# Altium PCB GPS-Module.PcbDoc (part 2 of 2)
Units mil, origin at the board's own origin, x right, y up, seen from the top; angles counter-clockwise.
Board outline 1574.8 x 1665 mil, 4 copper layers (Top Layer, Int1 (GND), Int2 (PWR), Bottom Layer), stack 60.119 mil thick; 48 components, 36 nets, 261 pads, 21 vias.
Unrouted connection lines stored in the file: 132.
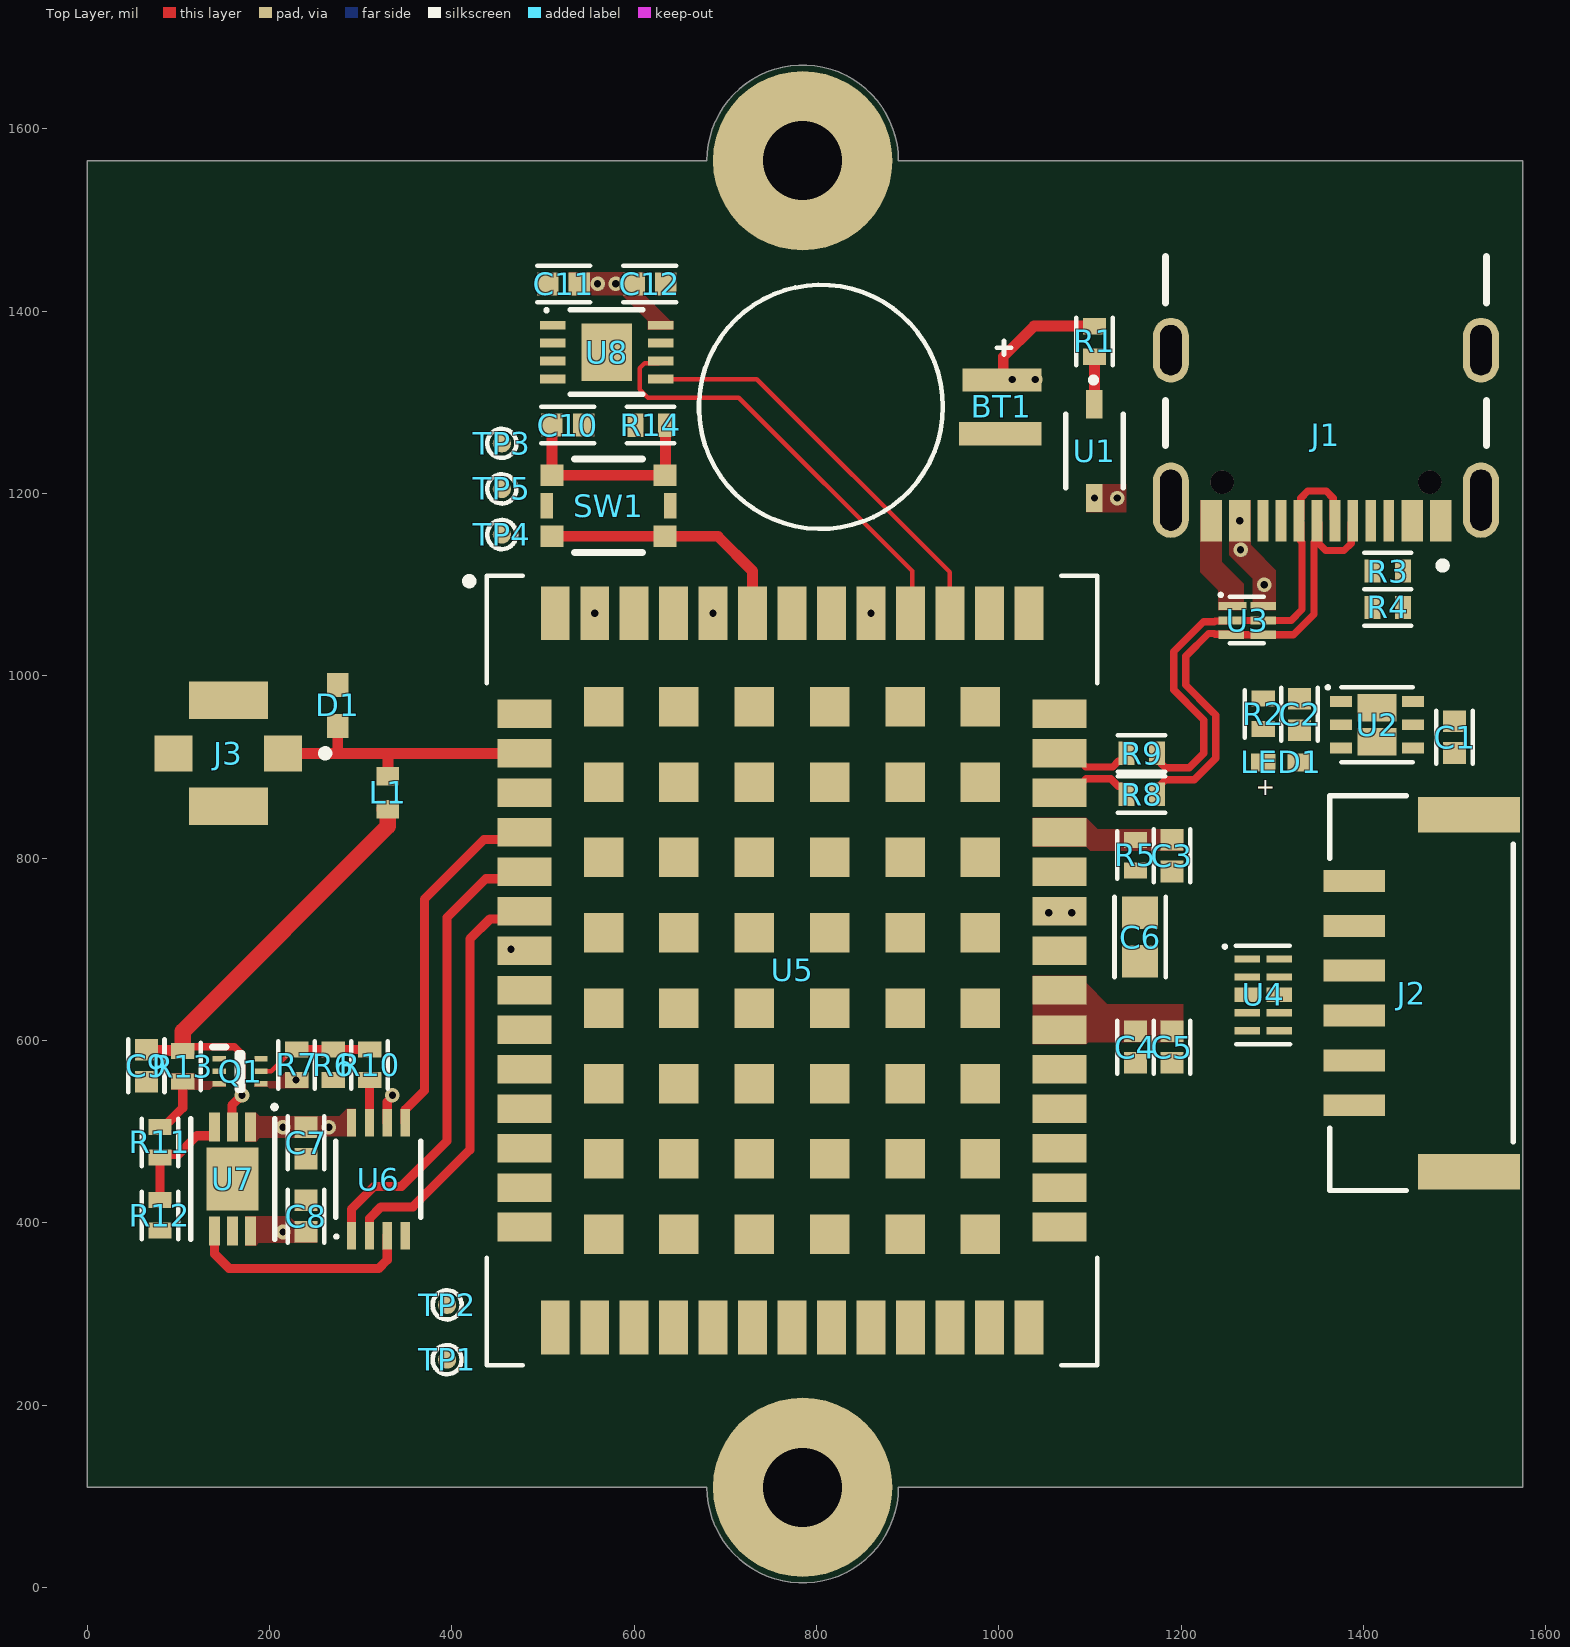
[diagram p0: Top Layer view]

## Part data (continued)
R1: library part ERJ-2RKF3001X, "Res Thick Film 0402 3K Ohm 1% 0.1W ±100ppm/°C Molded SMD Punched Carrier T/R", Case Code (Imperial)=0402, Case Code (Metric)=1005, Manufacturer=Panasonic, Max Operating Temperature=155°C, Max Power Dissipation=100mW, Min Operating Temperature=-55°C, Supplier Part Number=P3.00KLCT-ND, Temperature Coefficient=100ppm/°C, Tolerance=1%, Voltage Rating=50V, Case/Package=0402, Category="Chip SMD Resistors", China RoHS=Non-Compliant, ComponentLink1Description=https://sigma.octopart.com:443/138766958/technical_drawing/Panasonic-ERJ-2RKF3001X.pdf?src-supplier=Upverter, ComponentLink1URL=https://sigma.octopart.com:443/138766958/technical_drawing/Panasonic-ERJ-2RKF3001X.pdf?src-supplier=Upverter, ComponentLink2Description=https://datasheet.octopart.com:443/ERJ-2RKF3001X-Panasonic-datasheet-82288794.pdf?src-supplier=Panasonic+SCT, ComponentLink2URL=https://datasheet.octopart.com:443/ERJ-2RKF3001X-Panasonic-datasheet-82288794.pdf?src-supplier=Panasonic+SCT, ComponentLink3Description=https://datasheet.octopart.com:443/ERJ-2RKF3001X-Panasonic-datasheet-13266541.pdf?src-supplier=Future+Electronics, ComponentLink3URL=https://datasheet.octopart.com:443/ERJ-2RKF3001X-Panasonic-datasheet-13266541.pdf?src-supplier=Future+Electronics, ComponentLink4Description=https://datasheet.octopart.com:443/ERJ-2RKF3001X-Panasonic-datasheet-10025800.pdf?src-supplier=Future+Electronics, ComponentLink4URL=https://datasheet.octopart.com:443/ERJ-2RKF3001X-Panasonic-datasheet-10025800.pdf?src-supplier=Future+Electronics, ComponentLink5Description=https://datasheet.octopart.com:443/ERJ-2RKF3001X-Panasonic-datasheet-8853621.pdf?src-supplier=Future+Electronics, ComponentLink5URL=https://datasheet.octopart.com:443/ERJ-2RKF3001X-Panasonic-datasheet-8853621.pdf?src-supplier=Future+Electronics, ComponentLink6Description=https://datasheet.octopart.com:443/ERJ-2RKF3001X-Panasonic-datasheet-5313456.pdf?src-supplier=Future+Electronics, ComponentLink6URL=https://datasheet.octopart.com:443/ERJ-2RKF3001X-Panasonic-datasheet-5313456.pdf?src-supplier=Future+Electronics, ComponentLink7Description=https://datasheet.octopart.com:443/ERJ-2RKF3001X-Panasonic-datasheet-48891056.pdf?src-supplier=Newark, ComponentLink7URL=https://datasheet.octopart.com:443/ERJ-2RKF3001X-Panasonic-datasheet-48891056.pdf?src-supplier=Newark, ComponentLink8Description=https://datasheet.octopart.com:443/ERJ-2RKF3001X-Panasonic-datasheet-136608610.pdf?src-supplier=Newark, ComponentLink8URL=https://datasheet.octopart.com:443/ERJ-2RKF3001X-Panasonic-datasheet-136608610.pdf?src-supplier=Newark, ComponentLink9Description=https://datasheet.octopart.com:443/ERJ-2RKF3001X-Panasonic-datasheet-33006990.pdf?src-supplier=Newark, ComponentLink9URL=https://datasheet.octopart.com:443/ERJ-2RKF3001X-Panasonic-datasheet-33006990.pdf?src-supplier=Newark, ComponentLink10Description=https://datasheet.octopart.com:443/ERJ2RKF3001X-Panasonic-datasheet-21211697.pdf?src-supplier=element14+APAC, ComponentLink10URL=https://datasheet.octopart.com:443/ERJ2RKF3001X-Panasonic-datasheet-21211697.pdf?src-supplier=element14+APAC, ComponentLink11Description=https://datasheet.octopart.com:443/ERJ-2RKF3001X-Panasonic-datasheet-154766169.pdf?src-supplier=Master+Electronics, ComponentLink11URL=https://datasheet.octopart.com:443/ERJ-2RKF3001X-Panasonic-datasheet-154766169.pdf?src-supplier=Master+Electronics, ComponentLink12Description=https://datasheet.octopart.com:443/ERJ2RKF3001X-Panasonic-datasheet-188592431.pdf?src-supplier=TME, ComponentLink12URL=https://datasheet.octopart.com:443/ERJ2RKF3001X-Panasonic-datasheet-188592431.pdf?src-supplier=TME, ComponentLink13Description=https://datasheet.octopart.com:443/ERJ2RKF3001X-Panasonic-datasheet-164353789.pdf?src-supplier=TME, ComponentLink13URL=https://datasheet.octopart.com:443/ERJ2RKF3001X-Panasonic-datasheet-164353789.pdf?src-supplier=TME, ComponentLink14Description=https://datasheet.octopart.com/ERJ-2RKF3001X-Panasonic-datasheet-78375410.pdf, ComponentLink14URL=https://datasheet.octopart.com/ERJ-2RKF3001X-Panasonic-datasheet-78375410.pdf, ComponentLink15Description=https://datasheet.octopart.com:443/ERJ-2RKF3001X-Panasonic---ECG-datasheet-15994758.pdf?src-supplier=Farnell, ComponentLink15URL=https://datasheet.octopart.com:443/ERJ-2RKF3001X-Panasonic---ECG-datasheet-15994758.pdf?src-supplier=Farnell, ComponentLink16Description=https://datasheet.octopart.com:443/ERJ-2RKF3001X-Panasonic-datasheet-11542829.pdf?src-supplier=Arrow+Electronics, ComponentLink16URL=https://datasheet.octopart.com:443/ERJ-2RKF3001X-Panasonic-datasheet-11542829.pdf?src-supplier=Arrow+Electronics, ComponentLink17Description=https://datasheet.octopart.com:443/ERJ-2RKF3001X-Panasonic-datasheet-41391857.pdf?src-supplier=Electro+Sonic, ComponentLink17URL=https://datasheet.octopart.com:443/ERJ-2RKF3001X-Panasonic-datasheet-41391857.pdf?src-supplier=Electro+Sonic, Composition="Thick Film", Contact Plating=Tin, Depth=500µm, Features="Automotive AEC-Q200", Height=350µm, Lead Free="Lead Free", Length=1mm, Lifecycle Status=Production, Military Standard=Not, Mounting Technology="Surface Mount", MPN=ERJ-2RKF3001X, Number of Terminals=2, Number of Terminations=2, Packaging="Cut Tape", Power Dissipation=100mW, Power Rating=100mW, Pricing="1=0.1, 10=0.028, 25=0.0208, 50=0.0168, 100=0.0138, 250=0.01072, 500=0.009, 1000=0.00766, 5000=0.00554 (USD)", Radiation Hardening=No, REACH SVHC=Yes, RoHS=Compliant, Schedule B="8533210045, 8533210045|8533210045, 8533210045|8533210045|8533210045, 8533210045|8533210045|8533210045|8533210045", Stock=193068, Supplier=DigiKey, Termination=SMD/SMT, Voltage Rating (DC)=50V, Width=500µm, Working Voltage=50V
R2 R14: library part CRCW0402100RFKEDHP, "Res Thick Film 0402 100 Ohm 1% 0.2W ±100ppm/°C Molded SMD SMD Paper T/R", Case Code (Imperial)=0402, Case Code (Metric)=1005, Manufacturer=Vishay, Manufacturer Package Identifier=CRCW0402-HPe3, Max Operating Temperature=155°C, Min Operating Temperature=-55°C, Power Dissipation=200mW, Supplier Part Number=541-100YCT-ND, Temperature Coefficient=100ppm/°C, Tolerance=1%, Voltage Rating=50V, Case/Package=0402, Category="Chip SMD Resistors", China RoHS=Non-Compliant, ComponentLink1Description=https://datasheet.octopart.com/CRCW0402100RFKEDHP-Vishay-datasheet-83567917.pdf, ComponentLink1URL=https://datasheet.octopart.com/CRCW0402100RFKEDHP-Vishay-datasheet-83567917.pdf, ComponentLink2Description=https://datasheet.octopart.com/D-CRCW-e3-Standard-Thick-Film-Chip-Resistors-Vishay-datasheet-family-64.pdf, ComponentLink2URL=https://datasheet.octopart.com/D-CRCW-e3-Standard-Thick-Film-Chip-Resistors-Vishay-datasheet-family-64.pdf, ComponentLink3Description=https://datasheet.octopart.com:443/CRCW0402100RFKEDHP-Vishay-datasheet-87136057.pdf?src-supplier=element14+APAC, ComponentLink3URL=https://datasheet.octopart.com:443/CRCW0402100RFKEDHP-Vishay-datasheet-87136057.pdf?src-supplier=element14+APAC, ComponentLink4Description=https://datasheet.octopart.com:443/CRCW0402100RFKEDHP-Vishay-datasheet-78776210.pdf?src-supplier=element14+APAC, ComponentLink4URL=https://datasheet.octopart.com:443/CRCW0402100RFKEDHP-Vishay-datasheet-78776210.pdf?src-supplier=element14+APAC, ComponentLink5Description=https://datasheet.octopart.com:443/CRCW0402100RFKEDHP-Vishay-datasheet-62317933.pdf?src-supplier=element14+APAC, ComponentLink5URL=https://datasheet.octopart.com:443/CRCW0402100RFKEDHP-Vishay-datasheet-62317933.pdf?src-supplier=element14+APAC, ComponentLink6Description=https://datasheet.octopart.com:443/CRCW0402100RFKEDHP-Vishay-datasheet-37143532.pdf?src-supplier=element14+APAC, ComponentLink6URL=https://datasheet.octopart.com:443/CRCW0402100RFKEDHP-Vishay-datasheet-37143532.pdf?src-supplier=element14+APAC, ComponentLink7Description=https://datasheet.octopart.com:443/CRCW0402100RFKEDHP-Vishay-datasheet-66581887.pdf?src-supplier=element14+APAC, ComponentLink7URL=https://datasheet.octopart.com:443/CRCW0402100RFKEDHP-Vishay-datasheet-66581887.pdf?src-supplier=element14+APAC, ComponentLink8Description=https://datasheet.octopart.com:443/CRCW0402100RFKEDHP-Vishay-datasheet-13148866.pdf?src-supplier=_legacy+Avnet, ComponentLink8URL=https://datasheet.octopart.com:443/CRCW0402100RFKEDHP-Vishay-datasheet-13148866.pdf?src-supplier=_legacy+Avnet, ComponentLink9Description=https://datasheet.octopart.com:443/CRCW0402100RFKEDHP-Vishay-datasheet-13131392.pdf?src-supplier=_legacy+Avnet, ComponentLink9URL=https://datasheet.octopart.com:443/CRCW0402100RFKEDHP-Vishay-datasheet-13131392.pdf?src-supplier=_legacy+Avnet, ComponentLink10Description=https://datasheet.octopart.com:443/CRCW0402100RFKEDHP-Vishay-datasheet-12593106.pdf?src-supplier=_legacy+Avnet, ComponentLink10URL=https://datasheet.octopart.com:443/CRCW0402100RFKEDHP-Vishay-datasheet-12593106.pdf?src-supplier=_legacy+Avnet, ComponentLink11Description=https://datasheet.octopart.com:443/CRCW0402100RFKEDHP-Vishay-datasheet-12544674.pdf?src-supplier=_legacy+Avnet, ComponentLink11URL=https://datasheet.octopart.com:443/CRCW0402100RFKEDHP-Vishay-datasheet-12544674.pdf?src-supplier=_legacy+Avnet, ComponentLink12Description=https://datasheet.octopart.com:443/CRCW0402100RFKEDHP-Vishay-datasheet-12531795.pdf?src-supplier=_legacy+Avnet, ComponentLink12URL=https://datasheet.octopart.com:443/CRCW0402100RFKEDHP-Vishay-datasheet-12531795.pdf?src-supplier=_legacy+Avnet, ComponentLink13Description=https://datasheet.octopart.com:443/CRCW0402100RFKEDHP-Vishay-datasheet-12518686.pdf?src-supplier=_legacy+Avnet, ComponentLink13URL=https://datasheet.octopart.com:443/CRCW0402100RFKEDHP-Vishay-datasheet-12518686.pdf?src-supplier=_legacy+Avnet, ComponentLink14Description=https://datasheet.octopart.com:443/CRCW0402100RFKEDHP-Vishay-datasheet-12509906.pdf?src-supplier=_legacy+Avnet, ComponentLink14URL=https://datasheet.octopart.com:443/CRCW0402100RFKEDHP-Vishay-datasheet-12509906.pdf?src-supplier=_legacy+Avnet, ComponentLink15Description=https://datasheet.octopart.com:443/CRCW0402100RFKEDHP-Vishay-datasheet-10669844.pdf?src-supplier=_legacy+Avnet, ComponentLink15URL=https://datasheet.octopart.com:443/CRCW0402100RFKEDHP-Vishay-datasheet-10669844.pdf?src-supplier=_legacy+Avnet, ComponentLink16Description=https://datasheet.octopart.com:443/CRCW0402100RFKEDHP-Vishay-datasheet-8703221.pdf?src-supplier=_legacy+Avnet, ComponentLink16URL=https://datasheet.octopart.com:443/CRCW0402100RFKEDHP-Vishay-datasheet-8703221.pdf?src-supplier=_legacy+Avnet, ComponentLink17Description=https://datasheet.octopart.com:443/CRCW0402100RFKEDHP-Vishay-datasheet-62316122.pdf?src-supplier=Future+Electronics, ComponentLink17URL=https://datasheet.octopart.com:443/CRCW0402100RFKEDHP-Vishay-datasheet-62316122.pdf?src-supplier=Future+Electronics, ComponentLink18Description=https://datasheet.octopart.com:443/CRCW0402100RFKEDHP-Vishay-Dale-datasheet-47688881.pdf?src-supplier=RS+(Formerly+Allied+Electronics), ComponentLink18URL=https://datasheet.octopart.com:443/CRCW0402100RFKEDHP-Vishay-Dale-datasheet-47688881.pdf?src-supplier=RS+(Formerly+Allied+Electronics), ComponentLink19Description=https://datasheet.octopart.com:443/CRCW0402100RFKEDHP-Vishay-datasheet-8359436.pdf?src-supplier=Newark, ComponentLink19URL=https://datasheet.octopart.com:443/CRCW0402100RFKEDHP-Vishay-datasheet-8359436.pdf?src-supplier=Newark, ComponentLink20Description=http://sigma.octopart.com:80/rohs_certificate/D-CRCW-e3-Standard-Thick-Film-Chip-Resistors-Vishay-family-102.pdf?src-supplier=Compliance+Statements, ComponentLink20URL=http://sigma.octopart.com:80/rohs_certificate/D-CRCW-e3-Standard-Thick-Film-Chip-Resistors-Vishay-family-102.pdf?src-supplier=Compliance+Statements, Composition="Thick Film", Contact Plating=Tin, Depth=500µm, Height=300µm, Lead Free="Lead Free", Length=1mm, Lifecycle Status=Production, Mounting Technology="Surface Mount", MPN=CRCW0402100RFKEDHP, Number of Terminals=2, Packaging="Cut Tape", Power Rating=200mW, Pricing="1=0.11, 10=0.054, 25=0.0412, 50=0.034, 100=0.0286, 250=0.02312, 500=0.02002, 1000=0.01755, 5000=0.01363 (USD)", Radiation Hardening=No, REACH SVHC=Yes, RoHS=Compliant, Schedule B="8533210045, 8533210045|8533210045|8533210045|8533210045|8533210045|8533210045|8533210045, 8533210045|8533210045|8533210045|8533210045|8533210045|8533210045|8533210045|8533210045, 8533210045|8533210045|8533210045|8533210045|8533210045|8533210045|8533210045|8533210045|8533210045", Stock=523985, Supplier=DigiKey, Termination=SMD/SMT, Voltage Rating (DC)=50V, Weight=652.039032µg, Width=500µm, Working Voltage=50V
R3 R4: library part RC0402FR-135K1L, "Res Thick Film 0402 5.1K Ohm 1% 0.063W(1/16W) ±100ppm/C Pad SMD T/R", Case Code (Imperial)=0402, Case Code (Metric)=1005, Manufacturer="Yageo Group", Max Operating Temperature=155°C, Min Operating Temperature=-55°C, Power Dissipation=62.5mW, Supplier Part Number=13-RC0402FR-135K1LCT-ND, Temperature Coefficient=100ppm/°C, Tolerance=1%, Voltage Rating=50V, Case/Package=0402, Category="Chip SMD Resistors", China RoHS=Non-Compliant, ComponentLink1Description=https://datasheet.octopart.com:443/RC0402FR-135K1L-Yageo-datasheet-175887523.pdf?src-supplier=IHS, ComponentLink1URL=https://datasheet.octopart.com:443/RC0402FR-135K1L-Yageo-datasheet-175887523.pdf?src-supplier=IHS, ComponentLink2Description=https://datasheet.octopart.com:443/RC0402FR-135K1L-Yageo-datasheet-164759695.pdf?src-supplier=Future+Electronics, ComponentLink2URL=https://datasheet.octopart.com:443/RC0402FR-135K1L-Yageo-datasheet-164759695.pdf?src-supplier=Future+Electronics, ComponentLink3Description=https://datasheet.octopart.com/RC0402FR-135K1L-Yageo-datasheet-73766026.pdf, ComponentLink3URL=https://datasheet.octopart.com/RC0402FR-135K1L-Yageo-datasheet-73766026.pdf, ComponentLink4Description=https://datasheet.octopart.com:443/RC0402FR-135K1L-Yageo-datasheet-10408619.pdf?src-supplier=_legacy+Avnet, ComponentLink4URL=https://datasheet.octopart.com:443/RC0402FR-135K1L-Yageo-datasheet-10408619.pdf?src-supplier=_legacy+Avnet, ComponentLink5Description=http://sigma.octopart.com:80/conflict_mineral_statement/Yageo-company-3.pdf?src-supplier=Compliance+Statements, ComponentLink5URL=http://sigma.octopart.com:80/conflict_mineral_statement/Yageo-company-3.pdf?src-supplier=Compliance+Statements, ComponentLink6Description=http://sigma.octopart.com:80/rohs_statement/Yageo-company-2.pdf?src-supplier=Compliance+Statements, ComponentLink6URL=http://sigma.octopart.com:80/rohs_statement/Yageo-company-2.pdf?src-supplier=Compliance+Statements, Composition="Thick Film", Contact Plating=Tin, Height=350µm, Length=1mm, Lifecycle Status=Production, Mounting Technology="Surface Mount", MPN=RC0402FR-135K1L, Number of Terminals=2, Packaging="Tape & Reel", Power Rating=62.5mW, Pricing="1=0.1, 10=0.005, 25=0.0044, 50=0.004, 100=0.0036, 250=0.00328 (USD)", Radiation Hardening=No, REACH SVHC=Yes, RoHS=Compliant, Stock=214134, Supplier=DigiKey, Termination=SMD/SMT, Width=500µm, Working Voltage=50V
R5 R7 R12: library part CRCW0402100KFKEDC, "Res Thick Film 0402 100K Ohm 1% 0.063W(1/16W) ±100ppm/C Pad SMD T/R", Case/Package=0402, Manufacturer=Vishay, Max Operating Temperature=155°C, Min Operating Temperature=-55°C, Power Dissipation=63mW, Supplier Part Number=541-3960-1-ND, Temperature Coefficient=100ppm/°C, Tolerance=1%, Voltage Rating=50V, Category="Chip SMD Resistors", China RoHS=Non-Compliant, ComponentLink1Description=https://datasheet.octopart.com:443/CRCW0402100KFKEDC-Vishay-datasheet-102570912.pdf?src-supplier=Upverter, ComponentLink1URL=https://datasheet.octopart.com:443/CRCW0402100KFKEDC-Vishay-datasheet-102570912.pdf?src-supplier=Upverter, ComponentLink2Description=https://datasheet.octopart.com:443/CRCW0402100KFKEDC-Vishay-datasheet-175423585.pdf?src-supplier=IHS, ComponentLink2URL=https://datasheet.octopart.com:443/CRCW0402100KFKEDC-Vishay-datasheet-175423585.pdf?src-supplier=IHS, ComponentLink3Description=https://datasheet.octopart.com:443/CRCW0402100KFKEDC-Vishay-datasheet-100063072.pdf?src-supplier=Future+Electronics, ComponentLink3URL=https://datasheet.octopart.com:443/CRCW0402100KFKEDC-Vishay-datasheet-100063072.pdf?src-supplier=Future+Electronics, ComponentLink4Description=https://datasheet.octopart.com:443/CRCW0402100KFKEDC-Vishay-datasheet-62316122.pdf?src-supplier=Future+Electronics, ComponentLink4URL=https://datasheet.octopart.com:443/CRCW0402100KFKEDC-Vishay-datasheet-62316122.pdf?src-supplier=Future+Electronics, ComponentLink5Description=http://sigma.octopart.com:80/rohs_statement/Vishay-company-15.pdf?src-supplier=Compliance+Statements, ComponentLink5URL=http://sigma.octopart.com:80/rohs_statement/Vishay-company-15.pdf?src-supplier=Compliance+Statements, Composition="Thick Film", Contact Plating=Tin, Height=300µm, Lead Free="Lead Free", Length=1mm, Lifecycle Status=Production, Mounting Technology="Surface Mount", MPN=CRCW0402100KFKEDC, Number of Terminals=2, Power Rating=63mW, Pricing="1=0.1, 10=0.028, 25=0.0208, 50=0.0168, 100=0.0138, 250=0.01072, 500=0.009, 1000=0.00766, 5000=0.00554 (USD)", REACH SVHC=Yes, RoHS=Compliant, Schedule B="8533210045, 8533210045|8533210045, 8533210045|8533210045|8533210045, 8533210045|8533210045|8533210045|8533210045", Stock=265190, Supplier=DigiKey, Termination=Wraparound, Width=500µm, Working Voltage=50V
R6 R10: library part RC0402JR-070RL, "GENERAL PURPOSE CHIP RESISTOR Metal Glaze/thick Film, 0.0625W, 0ohm, Surface Mount, 0402", Case Code (Imperial)=0402, Manufacturer="Yageo Group", Max Operating Temperature=155°C, Max Power Dissipation=63mW, Min Operating Temperature=-55°C, Power Dissipation=62.5mW, Supplier Part Number=311-0.0JRCT-ND, Temperature Coefficient=200ppm/°C, Tolerance=5%, Voltage Rating=50V, Case/Package=0402, Category="Chip SMD Resistors", China RoHS=Non-Compliant, ComponentLink1Description=https://datasheet.octopart.com:443/RC0402JR-070RL-Yageo-datasheet-182189538.pdf?src-supplier=IHS, ComponentLink1URL=https://datasheet.octopart.com:443/RC0402JR-070RL-Yageo-datasheet-182189538.pdf?src-supplier=IHS, ComponentLink2Description=https://datasheet.octopart.com:443/RC0402JR-070RL-Yageo-datasheet-10408619.pdf?src-supplier=Newark, ComponentLink2URL=https://datasheet.octopart.com:443/RC0402JR-070RL-Yageo-datasheet-10408619.pdf?src-supplier=Newark, ComponentLink3Description=https://datasheet.octopart.com:443/RC0402JR-070RL-Yageo-datasheet-12531192.pdf?src-supplier=Seeed+Studio, ComponentLink3URL=https://datasheet.octopart.com:443/RC0402JR-070RL-Yageo-datasheet-12531192.pdf?src-supplier=Seeed+Studio, ComponentLink4Description=https://datasheet.octopart.com:443/RC0402JR-070RL-Yageo-datasheet-8324527.pdf?src-supplier=TME, ComponentLink4URL=https://datasheet.octopart.com:443/RC0402JR-070RL-Yageo-datasheet-8324527.pdf?src-supplier=TME, ComponentLink5Description=https://datasheet.octopart.com:443/RC0402JR-070RL-Yageo-datasheet-62067350.pdf?src-supplier=Farnell, ComponentLink5URL=https://datasheet.octopart.com:443/RC0402JR-070RL-Yageo-datasheet-62067350.pdf?src-supplier=Farnell, ComponentLink6Description=https://datasheet.octopart.com:443/RC0402JR-070RL-Yageo-datasheet-8329306.pdf?src-supplier=element14, ComponentLink6URL=https://datasheet.octopart.com:443/RC0402JR-070RL-Yageo-datasheet-8329306.pdf?src-supplier=element14, ComponentLink7Description=https://datasheet.octopart.com:443/RC0402JR-070RL-Yageo-datasheet-505231.pdf?src-supplier=element14, ComponentLink7URL=https://datasheet.octopart.com:443/RC0402JR-070RL-Yageo-datasheet-505231.pdf?src-supplier=element14, ComponentLink8Description=https://datasheet.octopart.com:443/RC0402JR-070RL-Yageo-datasheet-175423674.pdf?src-supplier=SOS+electronic, ComponentLink8URL=https://datasheet.octopart.com:443/RC0402JR-070RL-Yageo-datasheet-175423674.pdf?src-supplier=SOS+electronic, ComponentLink9Description=https://datasheet.octopart.com:443/RC0402JR-070RL-Yageo-datasheet-164759695.pdf?src-supplier=Future+Electronics, ComponentLink9URL=https://datasheet.octopart.com:443/RC0402JR-070RL-Yageo-datasheet-164759695.pdf?src-supplier=Future+Electronics, ComponentLink10Description=https://datasheet.octopart.com:443/RC0402JR-070RL-Yageo-datasheet-137700087.pdf?src-supplier=Future+Electronics, ComponentLink10URL=https://datasheet.octopart.com:443/RC0402JR-070RL-Yageo-datasheet-137700087.pdf?src-supplier=Future+Electronics, ComponentLink11Description=https://datasheet.octopart.com/RC0402JR-070RL-Yageo-datasheet-73766026.pdf, ComponentLink11URL=https://datasheet.octopart.com/RC0402JR-070RL-Yageo-datasheet-73766026.pdf, ComponentLink12Description=http://sigma.octopart.com:80/conflict_mineral_statement/Yageo-company-3.pdf?src-supplier=Compliance+Statements, ComponentLink12URL=http://sigma.octopart.com:80/conflict_mineral_statement/Yageo-company-3.pdf?src-supplier=Compliance+Statements, ComponentLink13Description=http://sigma.octopart.com:80/rohs_statement/Yageo-company-2.pdf?src-supplier=Compliance+Statements, ComponentLink13URL=http://sigma.octopart.com:80/rohs_statement/Yageo-company-2.pdf?src-supplier=Compliance+Statements, Composition="Thick Film", Contact Plating=Tin, Depth=500µm, Features="Moisture Resistant", Height=350µm, Lead Free="Lead Free", Length=1mm, Lifecycle Status=Production, Military Standard=Not, Mounting Technology="Surface Mount", MPN=RC0402JR-070RL, Number of Terminals=2, Number of Terminations=2, Packaging="Tape & Reel", Pins=2, Power Rating=63mW, Pricing="1=0.1, 10=0.010, 25=0.0064, 50=0.0054, 100=0.0047, 250=0.00392, 500=0.00346, 1000=0.00304, 5000=0.0023 (USD)", Radiation Hardening=No, REACH SVHC=Yes, RoHS=Compliant, Schedule B="8533290000, 8533290000|8533290000, 8533290000|8533290000|8533290000, 8533290000|8533290000|8533290000|8533290000", Stock=22123349, Supplier=DigiKey, Termination=SMD/SMT, Voltage Rating (DC)=50V, Width=500µm
R8 R9: library part RC0402JR-0727RL, "Res General Purpose Thick Film 0402 27 Ohm 5% 1/16W ±100ppm/°C Molded SMD Paper T/R", Case Code (Imperial)=0402, Manufacturer="Yageo Group", Max Operating Temperature=155°C, Min Operating Temperature=-55°C, Power Dissipation=62.5mW, Supplier Part Number=311-27JRCT-ND, Temperature Coefficient=100ppm/°C, Tolerance=5%, Voltage Rating=50V, Case/Package=0402, Category="Chip SMD Resistors", China RoHS=Non-Compliant, ComponentLink1Description=https://datasheet.octopart.com:443/RC0402JR-0727RL-Yageo-datasheet-175887523.pdf?src-supplier=IHS, ComponentLink1URL=https://datasheet.octopart.com:443/RC0402JR-0727RL-Yageo-datasheet-175887523.pdf?src-supplier=IHS, ComponentLink2Description=https://datasheet.octopart.com:443/RC0402JR-0727RL-Yageo-datasheet-10408619.pdf?src-supplier=Newark, ComponentLink2URL=https://datasheet.octopart.com:443/RC0402JR-0727RL-Yageo-datasheet-10408619.pdf?src-supplier=Newark, ComponentLink3Description=https://datasheet.octopart.com:443/RC0402JR-0727RL-Yageo-datasheet-8324527.pdf?src-supplier=Newark, ComponentLink3URL=https://datasheet.octopart.com:443/RC0402JR-0727RL-Yageo-datasheet-8324527.pdf?src-supplier=Newark, ComponentLink4Description=https://datasheet.octopart.com:443/RC0402JR-0727RL-Yageo-datasheet-62067350.pdf?src-supplier=element14+APAC, ComponentLink4URL=https://datasheet.octopart.com:443/RC0402JR-0727RL-Yageo-datasheet-62067350.pdf?src-supplier=element14+APAC, ComponentLink5Description=https://datasheet.octopart.com:443/RC0402JR-0727RL-Yageo-datasheet-164759695.pdf?src-supplier=Future+Electronics, ComponentLink5URL=https://datasheet.octopart.com:443/RC0402JR-0727RL-Yageo-datasheet-164759695.pdf?src-supplier=Future+Electronics, ComponentLink6Description=https://datasheet.octopart.com:443/RC0402JR-0727RL-Yageo-datasheet-127823281.pdf?src-supplier=Future+Electronics, ComponentLink6URL=https://datasheet.octopart.com:443/RC0402JR-0727RL-Yageo-datasheet-127823281.pdf?src-supplier=Future+Electronics, ComponentLink7Description=https://datasheet.octopart.com:443/RC0402JR-0727RL-Yageo-datasheet-137700087.pdf?src-supplier=Future+Electronics, ComponentLink7URL=https://datasheet.octopart.com:443/RC0402JR-0727RL-Yageo-datasheet-137700087.pdf?src-supplier=Future+Electronics, ComponentLink8Description=https://datasheet.octopart.com:443/RC0402JR-0727RL-Yageo-datasheet-103092701.pdf?src-supplier=Future+Electronics, ComponentLink8URL=https://datasheet.octopart.com:443/RC0402JR-0727RL-Yageo-datasheet-103092701.pdf?src-supplier=Future+Electronics, ComponentLink9Description=https://datasheet.octopart.com:443/RC0402JR-0727RL-Yageo-datasheet-12531192.pdf?src-supplier=Future+Electronics, ComponentLink9URL=https://datasheet.octopart.com:443/RC0402JR-0727RL-Yageo-datasheet-12531192.pdf?src-supplier=Future+Electronics, ComponentLink10Description=https://datasheet.octopart.com:443/RC0402JR-0727RL-Yageo-datasheet-505231.pdf?src-supplier=Future+Electronics, ComponentLink10URL=https://datasheet.octopart.com:443/RC0402JR-0727RL-Yageo-datasheet-505231.pdf?src-supplier=Future+Electronics, ComponentLink11Description=https://datasheet.octopart.com/RC0402JR-0727RL-Yageo-datasheet-73766026.pdf, ComponentLink11URL=https://datasheet.octopart.com/RC0402JR-0727RL-Yageo-datasheet-73766026.pdf, ComponentLink12Description=https://datasheet.octopart.com:443/RC0402JR-0727RL-Yageo-datasheet-8329306.pdf?src-supplier=element14, ComponentLink12URL=https://datasheet.octopart.com:443/RC0402JR-0727RL-Yageo-datasheet-8329306.pdf?src-supplier=element14, ComponentLink13Description=http://sigma.octopart.com:80/rohs_statement/Yageo-company-2.pdf?src-supplier=Compliance+Statements, ComponentLink13URL=http://sigma.octopart.com:80/rohs_statement/Yageo-company-2.pdf?src-supplier=Compliance+Statements, ComponentLink14Description=http://sigma.octopart.com:80/conflict_mineral_statement/Yageo-company-3.pdf?src-supplier=Compliance+Statements, ComponentLink14URL=http://sigma.octopart.com:80/conflict_mineral_statement/Yageo-company-3.pdf?src-supplier=Compliance+Statements, Composition="Thick Film", Depth=500µm, Height=350µm, Lead Free="Lead Free", Length=1mm, Lifecycle Status=Production, Military Standard=Not, Mounting Technology="Surface Mount", MPN=RC0402JR-0727RL, Number of Terminals=2, Pins=2, Power Rating=62.5mW, Pricing="1=0.1, 10=0.006, 25=0.0044, 50=0.003, 100=0.0028 (USD)", REACH SVHC=Yes, RoHS=Compliant, Schedule B="8533210045, 8533210045|8533210045|8533210045|8533210045|8533210045", Stock=810923, Supplier=DigiKey, Termination=SMD/SMT, Voltage Rating (AC)=50V, Voltage Rating (DC)=50V, Weight=652.039032µg, Width=500µm, Working Voltage=50V
R11: library part CRCW04021K00FKEDC, "Res Thick Film 0402 1K Ohm 1% 0.063W(1/16W) ±100ppm/C Pad SMD T/R", Case/Package=0402, Manufacturer=Vishay, Max Operating Temperature=155°C, Min Operating Temperature=-55°C, Power Dissipation=63mW, Supplier Part Number=541-3961-1-ND, Temperature Coefficient=100ppm/°C, Tolerance=1%, Voltage Rating=50V, Category="Chip SMD Resistors", China RoHS=Non-Compliant, ComponentLink1Description=https://datasheet.octopart.com:443/CRCW04021K00FKEDC-Vishay-datasheet-102570912.pdf?src-supplier=Upverter, ComponentLink1URL=https://datasheet.octopart.com:443/CRCW04021K00FKEDC-Vishay-datasheet-102570912.pdf?src-supplier=Upverter, ComponentLink2Description=https://datasheet.octopart.com:443/CRCW04021K00FKEDC-Vishay-datasheet-175423585.pdf?src-supplier=IHS, ComponentLink2URL=https://datasheet.octopart.com:443/CRCW04021K00FKEDC-Vishay-datasheet-175423585.pdf?src-supplier=IHS, ComponentLink3Description=https://datasheet.octopart.com:443/CRCW04021K00FKEDC-Vishay-datasheet-100063072.pdf?src-supplier=Future+Electronics, ComponentLink3URL=https://datasheet.octopart.com:443/CRCW04021K00FKEDC-Vishay-datasheet-100063072.pdf?src-supplier=Future+Electronics, ComponentLink4Description=https://datasheet.octopart.com:443/CRCW04021K00FKEDC-Vishay-datasheet-62316122.pdf?src-supplier=Future+Electronics, ComponentLink4URL=https://datasheet.octopart.com:443/CRCW04021K00FKEDC-Vishay-datasheet-62316122.pdf?src-supplier=Future+Electronics, ComponentLink5Description=http://sigma.octopart.com:80/rohs_statement/Vishay-company-15.pdf?src-supplier=Compliance+Statements, ComponentLink5URL=http://sigma.octopart.com:80/rohs_statement/Vishay-company-15.pdf?src-supplier=Compliance+Statements, Composition="Thick Film", Contact Plating=Tin, Height=300µm, Lead Free="Lead Free", Length=1mm, Lifecycle Status=Production, Mounting Technology="Surface Mount", MPN=CRCW04021K00FKEDC, Number of Terminals=2, Power Rating=63mW, Pricing="1=0.1, 10=0.028, 25=0.0208, 50=0.0168, 100=0.0138, 250=0.01072, 500=0.009, 1000=0.00766, 5000=0.00546 (USD)", REACH SVHC=Yes, RoHS=Compliant, Schedule B="8533210045, 8533210045|8533210045|8533210045|8533210045|8533210045", Stock=1938339, Supplier=DigiKey, Termination=Wraparound, Width=500µm, Working Voltage=50V
R13: library part CR0402-FX-18R0GLF, "Res Thick Film 0402 18 Ohm 1% 0.063W(1/16W) ±100ppm/C Pad SMD T/R", Case Code (Imperial)=0402, Case Code (Metric)=1005, Manufacturer=Bourns, Max Operating Temperature=155°C, Min Operating Temperature=-55°C, Power Dissipation=62.5mW, Supplier Part Number=CR0402-FX-18R0GLFCT-ND, Temperature Coefficient=100ppm/°C, Tolerance=1%, Voltage Rating=50V, Case/Package=0402, Category="Chip SMD Resistors", China RoHS=Non-Compliant, ComponentLink1Description=https://datasheet.octopart.com:443/CR0402-FX-18R0GLF-Bourns-datasheet-159578630.pdf?src-supplier=IHS, ComponentLink1URL=https://datasheet.octopart.com:443/CR0402-FX-18R0GLF-Bourns-datasheet-159578630.pdf?src-supplier=IHS, ComponentLink2Description=https://datasheet.octopart.com:443/CR0402-FX-18R0GLF-Bourns-datasheet-181955239.pdf?src-supplier=IHS, ComponentLink2URL=https://datasheet.octopart.com:443/CR0402-FX-18R0GLF-Bourns-datasheet-181955239.pdf?src-supplier=IHS, ComponentLink3Description=https://datasheet.octopart.com:443/CR0402-FX-18R0GLF-Bourns-datasheet-154729664.pdf?src-supplier=Electro+Sonic, ComponentLink3URL=https://datasheet.octopart.com:443/CR0402-FX-18R0GLF-Bourns-datasheet-154729664.pdf?src-supplier=Electro+Sonic, ComponentLink4Description=https://datasheet.octopart.com/CR0402-FX-18R0GLF-Bourns-datasheet-8723995.pdf, ComponentLink4URL=https://datasheet.octopart.com/CR0402-FX-18R0GLF-Bourns-datasheet-8723995.pdf, ComponentLink5Description=https://datasheet.octopart.com:443/CR0402-FX-18R0GLF-Bourns-datasheet-140567134.pdf?src-supplier=Arrow.cn, ComponentLink5URL=https://datasheet.octopart.com:443/CR0402-FX-18R0GLF-Bourns-datasheet-140567134.pdf?src-supplier=Arrow.cn, ComponentLink6Description=http://sigma.octopart.com:80/conflict_mineral_statement/Bourns-company-36.pdf?src-supplier=Compliance+Statements, ComponentLink6URL=http://sigma.octopart.com:80/conflict_mineral_statement/Bourns-company-36.pdf?src-supplier=Compliance+Statements, Composition="Thick Film", Contact Plating=Tin, Depth=500µm, Height=320µm, Lifecycle Status=Production, Military Standard=Not, Mounting Technology="Surface Mount", MPN=CR0402-FX-18R0GLF, Number of Terminals=2, Power Rating=62.5mW, Pricing="1=0.1, 10=0.016, 25=0.0112, 50=0.0086, 100=0.0069, 250=0.00516, 500=0.00422, 1000=0.00349, 5000=0.00259 (USD)", Radiation Hardening=No, REACH SVHC=Yes, RoHS=Compliant, Schedule B="8533210045, 8533210045|8533210045|8533210045|8533210045|8533210045", Stock=441130, Supplier=DigiKey, Termination=SMD/SMT, Width=500µm, Working Voltage=50V
SW1: "WS-TASV SMT Tact Switch with ground terminal, L3 x W2.6 x H1.4mm, 450g, SPST-NO, 12V, 50mA", Manufacturer="Wurth Elektronik", Operating Temperature Max=85°C, Operating Temperature Min=-40°C, Rated Current=50mA, Rated Voltage (DC)=12V, Category="Tact Switches", Circuit=SPST-NO, ComponentLink1Description="Website Link", ComponentLink1URL=https://www.we-online.com/redexpert/article/435151014845?ad, ComponentLink2Description="Datasheet Link", ComponentLink2URL=https://www.we-online.com/redexpert/spec/435151014845?ad, Contact Material="Stainless Steel", Contact Plating=Silver, Height=1.4mm, Length=3mm, Match Code=WS-TASV, Mount="Surface Mount", MPN=435151014845, Operation Force=450g, Packaging="Tape and Reel", Terminal Material="Copper Alloy", Terminal Plating=Silver, Washable=No, Width=2.6mm
U1: "Diode 30 V 30mA Surface Mount SOD-323", Manufacturer_Name=onsemi, Copyright="Copyright (C) 2025 Ultra Librarian. All rights reserved.", MPN=RB751V40T1G, RefDes=RefDes, Type=Type
U2: "Linear Voltage Regulator IC Positive Fixed 1 Output 500mA 6-WDFN (2x2)", Manufacturer_Name=onsemi, Copyright="Copyright (C) 2025 Ultra Librarian. All rights reserved.", MPN=NCV8705MT33TCG, RefDes=RefDes, Type=Type
U3: "TVS DIODE 5.5VWM 6UDFN", Manufacturer_Name=onsemi, Copyright="Copyright (C) 2025 Ultra Librarian. All rights reserved.", MPN=ESDR0502NMUTBG, RefDes=RefDes, Type=Type
U4: "TVS DIODE 5VWM 10VC 10UDFN", Manufacturer_Name=onsemi, Copyright="Copyright (C) 2025 Ultra Librarian. All rights reserved.", MPN=ESD7104MUTAG, RefDes=RefDes, Type=Type
U5: "series RF Receiver BeiDou, Galileo, GLONASS, GNSS, GPS 1.207GHz, 1.2276GHz, 1.246GHz, 1.561GHz, 1.575GHz, 1.602GHz -167dBm 921.6kbps - 54-LGA (22x17)", Package="SMD-54 u-blox", Check_prices=https://www.snapeda.com/parts/ZED-F9P-04B/u-blox/view-part/?ref=eda, MF=U-Blox, MPN=ZED-F9P-04B, SnapEDA_Link=https://www.snapeda.com/parts/ZED-F9P-04B/u-blox/view-part/?ref=snap
U6: "Automotive 3-ch, 1.65-V to 5.5-V buffers with open-drain outputs 8-VSSOP -40 to 125", Manufacturer_Name="Texas Instruments", Copyright="Copyright (C) 2025 Ultra Librarian. All rights reserved.", Datasheet=https://www.ti.com/lit/gpn/sn74lvc3g07-q1, MPN=SN74LVC3G07QDCURQ1, RefDes=RefDes, Type=Type
U7: "Op Amp Single Low Power Amplifier R-R I/O 18V Automotive 6-Pin DFN EP T/R", Package="DFN -6 Analog Devices", Availability="In Stock", Check_prices=https://www.snapeda.com/parts/LT6000CDCB%23TRPBF/Analog+Devices/view-part/?ref=eda, MF="Analog Devices", MPN=LT6000CDCB#TRPBF, Price=None, SnapEDA_Link=https://www.snapeda.com/parts/LT6000CDCB%23TRPBF/Analog+Devices/view-part/?ref=snap
U8: "IC EEPROM 512KBIT I2C 8UDFN", Manufacturer_Name=Microchip, Copyright="Copyright (C) 2025 Ultra Librarian. All rights reserved.", MPN=AT24C512C-MAHM-T, RefDes=RefDes, Type=Type

## Free pads (board coordinates)
  round 196.85 hole 86.61: 1(785,110) 1(785,1565)

## Via types
v1: diameter 16, hole 8, Top Layer to Bottom Layer, tented both sides, 21 vias

## Nets (pads, with @x,y where several pads share a name; then routed paths per layer and width w, separated by ;. In a path a pad name is that pad's centre, name@x,y a point inside that pad or via, vN(x,y) a via of type N, cw(c..) or ccw(c..) an arc to the next point about the centre after c; other vN are vias at no path point)
3V3: C2.2 C3.2 C4.2 C5.2 C7.2 C8.2 C11.1 C12.1 R2.2 R5.2 U1.2 U2.1 U5.33 U5.34 U5.38 U6.8 U7.1 U7.6 U8.8
  other v1: 215,390 215,505 265,505 1105,1195.04 1130,1195 560,1430 580,1430
ANT_DET: U5.4 U6.5 | length 394.1
  Top Layer w10: U6.5 349.06,524.06 370,545 370,755 435.33,820.33 471.91,820.33 U5.4
ANT_OFF: U5.5 U6.1 | length 515.8
  Top Layer w10: U6.1 290,415 315,440 345,440 395,490 395,735 437.49,777.49 472.37,777.49 U5.5
ANT_SHORT_N: U5.6 U6.2 | length 464.2
  Top Layer w10: U6.2 309.69,404.69 322.5,417.5 357.5,417.5 420,480 420,711.34 441.99,733.33 471.52,733.33 U5.6
ANT_SUPPLY: D1.1 J3.1 L1.1 U5.2 | length 320
  Top Layer w12: J3.1 275,915.04 ; D1.1 275,915.04 ; L1.1 330,915.04 ; U5.2 330,915.04 ; 275,915.04 330,915.04
CC1: J1.A5 R3.1
CC2: J1.B5 R4.2
GEOFENCE_STAT: TP1.1 U5.19
GND: BT1.NEG C1.1 C2.1 C3.1 C4.1 C5.1 C6.2 C7.1 C8.1 C9.1 C10.1 C11.2 C12.2 D1.2 J1.A1_B12 J1.B1_A12 J1.SH1 J1.SH2 J1.SH3 J1.SH4 J2.6 J3.S1 J3.S2 J3.S3 LED1.1 Q1.1 Q1.2 R3.2 R4.1 R5.1 R6.2 R12.1 R14.1 SW1.G1 SW1.G2 U2.4 U3.1 U4.3 U4.8 U5.1 U5.3 U5.12 U5.14 U5.32 U5.37 U5.41 U5.48 U5.54 U5.55 U5.56 U5.57 U5.58 U5.59 U5.60 U5.61 U5.62 U5.63 U5.64 U5.65 U5.66 U5.67 U5.68 U5.69 U5.70 U5.71 U5.72 U5.73 U5.74 U5.75 U5.76 U5.77 U5.78 U5.79 U5.80 U5.81 U5.82 U5.83 U5.84 U5.85 U5.86 U5.87 U5.88 U5.89 U5.90 U5.91 U5.92 U5.93 U5.94 U5.95 U5.96 U5.97 U5.98 U5.99 U5.100 U5.101 U5.102 U6.4 U7.5 U8.1 U8.2 U8.3 U8.4
NetC9_2: C9.2 L1.2 R13.1 U6.6 U7.2 | length 755.5
  Top Layer w8: R13.1 109.86,593.32 161.68,593.32 170,585 v1(170,540)
  Top Layer w10: U7.2 158.97,505.76 158.97,528.97 v1(170,540) ; U6.6 329.37,532.75 335,538.38 v1(335,540)
  Top Layer w12: C9.2 65.59,589.06 104.41,589.06 R13.1
  Top Layer w18: R13.1 105,610 330,835 L1.2
  Top Layer w20: L1.2@327.6,853.74 327.64,853.78 L1.2
  Int2 (PWR) w8: v1(170,540) 171.53,538.47 177.19,538.47 177.39,538.26 236.09,538.26 236.13,538.22 327.57,538.22 327.81,538.47 333.47,538.47 v1(335,540)
NetC10_2: C10.2 R14.2 SW1.B1 SW1.B2 | length 234.4
  Top Layer w12: C10.2 SW1.B2 SW1.B1 634.51,1220.53 634.51,1274.55 R14.2
NetLED1_2: LED1.2 R2.1
NetQ1_3: Q1.3 R11.2 R13.2 | length 66.3
  Top Layer w5: R13.2 R13.2@107.56,552.44
  Top Layer w10: R11.2 83.94,505 105,526.06 R13.2
NetQ1_5: Q1.5 R6.1 R7.1 R10.1 | length 121
  Top Layer w5: Q1.5 202.24,566.22 R7.1@223.13,587.11
  Top Layer w10: R7.1 R6.1 R10.1
NetR1_2: R1.2 U1.1 | length 52
  Top Layer w12: U1.1 R1.2
NetR10_2: R10.2 U6.7 | length 46.7
  Top Layer w10: U6.7 309.69,556.26 R10.2
NetR11_1: R11.1 R12.2 U7.3 | length 125.4
  Top Layer w10: R12.2 R11.1 83.46,475 100,475 120.54,495.54 139,495.54 140,496.54 U7.3
NetU6_3: U6.3 U7.4 | length 251.6
  Top Layer w10: U7.4 140,365.86 155.86,350 320,350 329.37,359.37 U6.3
RESET_N: SW1.A1 SW1.A2 U5.49 | length 282.2
  Top Layer w12: SW1.A2 SW1.A1 691.89,1153.11 730,1115 U5.49
RTK_STAT: TP2.1 U5.20
SAFEBOOT_N: TP5.1 U5.50
  other v1: 686.69,1068.58
TIMEPULSE: TP4.1 U5.53
  other v1: 556.77,1068.58
TX_READY: TP3.1 U5.46
  other v1: 859.92,1068.58
UART1_RX: J2.4 U4.2 U4.9 U5.43
UART1_TX: J2.5 U4.1 U4.10 U5.42
UART2_RX: J2.2 U4.5 U4.6 U5.26
UART2_TX: J2.3 U4.4 U4.7 U5.27
USB_N: J1.A7 J1.B7 R8.2 U3.3 U3.4 | length 545.8
  Top Layer w8: R8.2 1178.32,874.9 1178.32,881.35 1183.01,886.04 1214.42,886.04 1238,909.62 1238,957 1233.81,961.19 1205,990 1205,1021.37 1230,1046.37 1236.73,1046.37 1237.61,1045.5 1254.5,1045.5 U3.3 U3.4 1323.38,1045 1345.71,1067.33 1345.71,1146.72 J1.A7@1347.15,1148.15 ; J1.A7 1350.96,1168.13 1350.96,1145.13 1358.69,1137.4 1378.79,1137.4 1386.52,1145.13 1386.52,1168.13 J1.B7
USB_P: J1.A6 J1.B6 R9.2 U3.2 U3.5 | length 545.8
  Top Layer w8: R9.2 1178.32,910.18 1178.32,903.73 1183.01,899.04 1209.04,899.04 1225,915 1225,951.62 1220.81,955.81 1192,984.62 1192,1026.76 1224.62,1059.37 1236.73,1059.37 1237.61,1060.25 1254.5,1060.25 U3.2 U3.5 1320.75,1060.75 1332.71,1072.71 1332.71,1146.72 1331.28,1148.15 1331.28,1168.13 J1.B6 1331.28,1171.94 1331.28,1194.95 1339.01,1202.68 1359.1,1202.68 1366.83,1194.95 1366.83,1171.94 J1.A6
USBR_N: R8.1 U5.39 | length 89
  Top Layer w8: U5.39 1080.39,871.73 1095.66,887 1123.04,887 1131.2,878.83 1135.14,878.83 1140,873.98 R8.1
USBR_P: R9.1 U5.40 | length 88.2
  Top Layer w8: U5.40 1080.39,915.04 1095.43,900 1124.96,900 1131.2,906.24 1135.14,906.24 1140,911.1 R9.1
V_BCKP: BT1.POS C6.1 R1.1 U5.36 | length 139.8
  Top Layer w12: BT1.POS 1005,1325.75 1005,1350 1038.5,1383.5 R1.1
  other v1: 1055,740 1080,740 1015,1325 1040,1325
VBUS: C1.2 J1.A4_B9 J1.B4_A9 J2.1 U2.5 U2.8 U3.6
  other v1: 1291.11,1099.89 1265.3,1138.26 1264.41,1170.04
VCC_RF: Q1.4 R7.2 U5.7 | length 301
  Top Layer w5: R7.2@225.87,552.44 R7.2
  Int2 (PWR) w12: v1(229.18,556.81) 321.81,556.81 v1(465,700)
ZED_SCL: U5.45 U8.6 | length 478
  Top Layer w5: U8.6 627.09,1343.1 611.82,1343.1 606.06,1337.33 606.06,1314.26 615.32,1305 715,1305 905,1115 905,1070.35 U5.45
ZED_SDA: U5.44 U8.5 | length 450.1
  Top Layer w5: U8.5 734.53,1325.47 946.54,1113.46 U5.44
pads on no net: J1. J1.A8 J1.B8 J2.7 J2.8 Q1.6 U2.2 U2.3 U2.6 U2.7 U5.8 U5.9 U5.10 U5.11 U5.13 U5.15 U5.16 U5.17 U5.18 U5.21 U5.22 U5.23 U5.24 U5.25 U5.28 U5.29 U5.30 U5.31 U5.35 U5.47 U5.51 U5.52 U7.7 U8.7 U8.9

## Polygon pours and split planes (outlines as drawn)
GND on Top Layer "GND_L01_P015" (solid, pour order 15): 1221.1,1192.68 1244.72,1192.68 1244.72,1125.28 1268.74,1101.26 1268.74,1072 1241,1072 1241,1094 1221.1,1113.9 1221.1,1147.4
VBUS on Top Layer "VBUS_L01_P012" (solid, pour order 12): 1252.6,1192.68 1252.6,1132.4 1278.54,1106.46 1278.54,1072 1304,1072 1304,1116 1276.22,1143.78 1276.22,1192.68
3V3 on Top Layer "3V3_L01_P011" (solid, pour order 11): 528.19,1417.4 528.19,1442.6 611.81,1442.6 611.81,1417.4 639.78,1389.43 643.02,1389.43 643.02,1379.62 615.28,1379.62 615.28,1389.43 587.31,1417.4
3V3 on Top Layer "3V3_L01_P010" (solid, pour order 10): 1096,1210.54 1096.54,1210 1140,1210 1140,1179.54 1096,1179.54
3V3 on Top Layer "3V3_L01_P008" (solid, pour order 8): 1037.09,812.68 1037.09,844.17 1096.14,844.17 1108.46,831.85 1202.6,831.85 1202.6,808.23 1100.59,808.23 1096.14,812.68
3V3 on Top Layer "3V3_L01_P007" (solid, pour order 7): 1037.09,596.14 1037.09,670.94 1096.14,670.94 1096.14,663.11 1119.25,640 1202.6,640 1202.6,598.23 1098.23,598.23 1096.14,596.14
VCC_RF on Top Layer "VCC_RF_L01_P000" (solid, pour order 0): 183.64,555.39 207.17,555.39 217.2,565.43 242.8,565.43 242.8,547.72 199.78,547.72 198.01,549.49 183.64,549.49
3V3 on Top Layer "3V3_L01_P006" (solid, pour order 6): 173.37,407.04 173.37,375.04 185.37,375.04 188.56,378.23 252.6,378.23 252.6,401.85 227.4,401.85 222.21,407.04 185.37,407.04
3V3 on Top Layer "3V3_L01_P005" (solid, pour order 5): 173.37,489.04 173.37,521.04 185.37,521.04 189.56,516.85 276.85,516.85 285,525 295,525 295,495 254.37,495 252.6,493.23 189.56,493.23 185.37,489.04
NetQ1_3 on Top Layer "NETQ1_3_L01_P001" (solid, pour order 1): 152.19,555.39 126.26,555.39 117.8,563.86 92.2,563.86 92.2,546.14 134.47,546.14 137.81,549.49 152.19,549.49
V_BCKP on Int2 (PWR) "V_BCKP_L03_P009" (solid, pour order 9): 1056.27,757.56 1037.09,757.56 1037.09,726.06 1096.14,726.06 1096.14,757.56 1077.29,757.56 1077.29,1337.36 960.51,1337.36 960.51,1311.77 1056.27,1311.77
3V3 on Int2 (PWR) "3V3_L03_P003" (solid, pour order 3): 490,1450 490,1360 1105,1360 1105,525 140,525 140,365 1235,365 1235,895 1350,895 1350,1015 1235,1015 1235,1450
VBUS on Int2 (PWR) "VBUS_L03_P004" (solid, pour order 4): 1250,1245 1250,1035 1370,1035 1370,505 1530,505 1530,1245

## Silkscreen, mask and mechanical layers (free items; w line width, h text height)
Mechanical 1:
  lines w5: 680,1565 0,1565 0,110 680,110 ccw(c785,110) 890,110 1574.8,110 1574.8,1565 890,1565 ; 681.25,1581.13 cw(c785,1565) 889.04,1579.19

## Text inside footprints (layer, text, board x,y; h text height)
J1: Mechanical 13 "PCB EDGE" at 1146.3,1455.67 h16 r180
LED1: Top Overlay "+" at 1282,892 h32 r180